# Altium PCB System Control.PcbDoc (part 7 of 7)
Units mil, origin at the board's own origin, x right, y up, seen from the top; angles counter-clockwise.
Board outline 5312.56 x 5103.22 mil, 12 copper layers (Top, GND 2, Signal 3, Signal 4, 3.3V 5, Signal 6, Signal 7, 2.5V 8, Signal 9, Signal 10, GND 11, Bottom); 503 components, 484 nets, 2219 pads, 1158 vias.
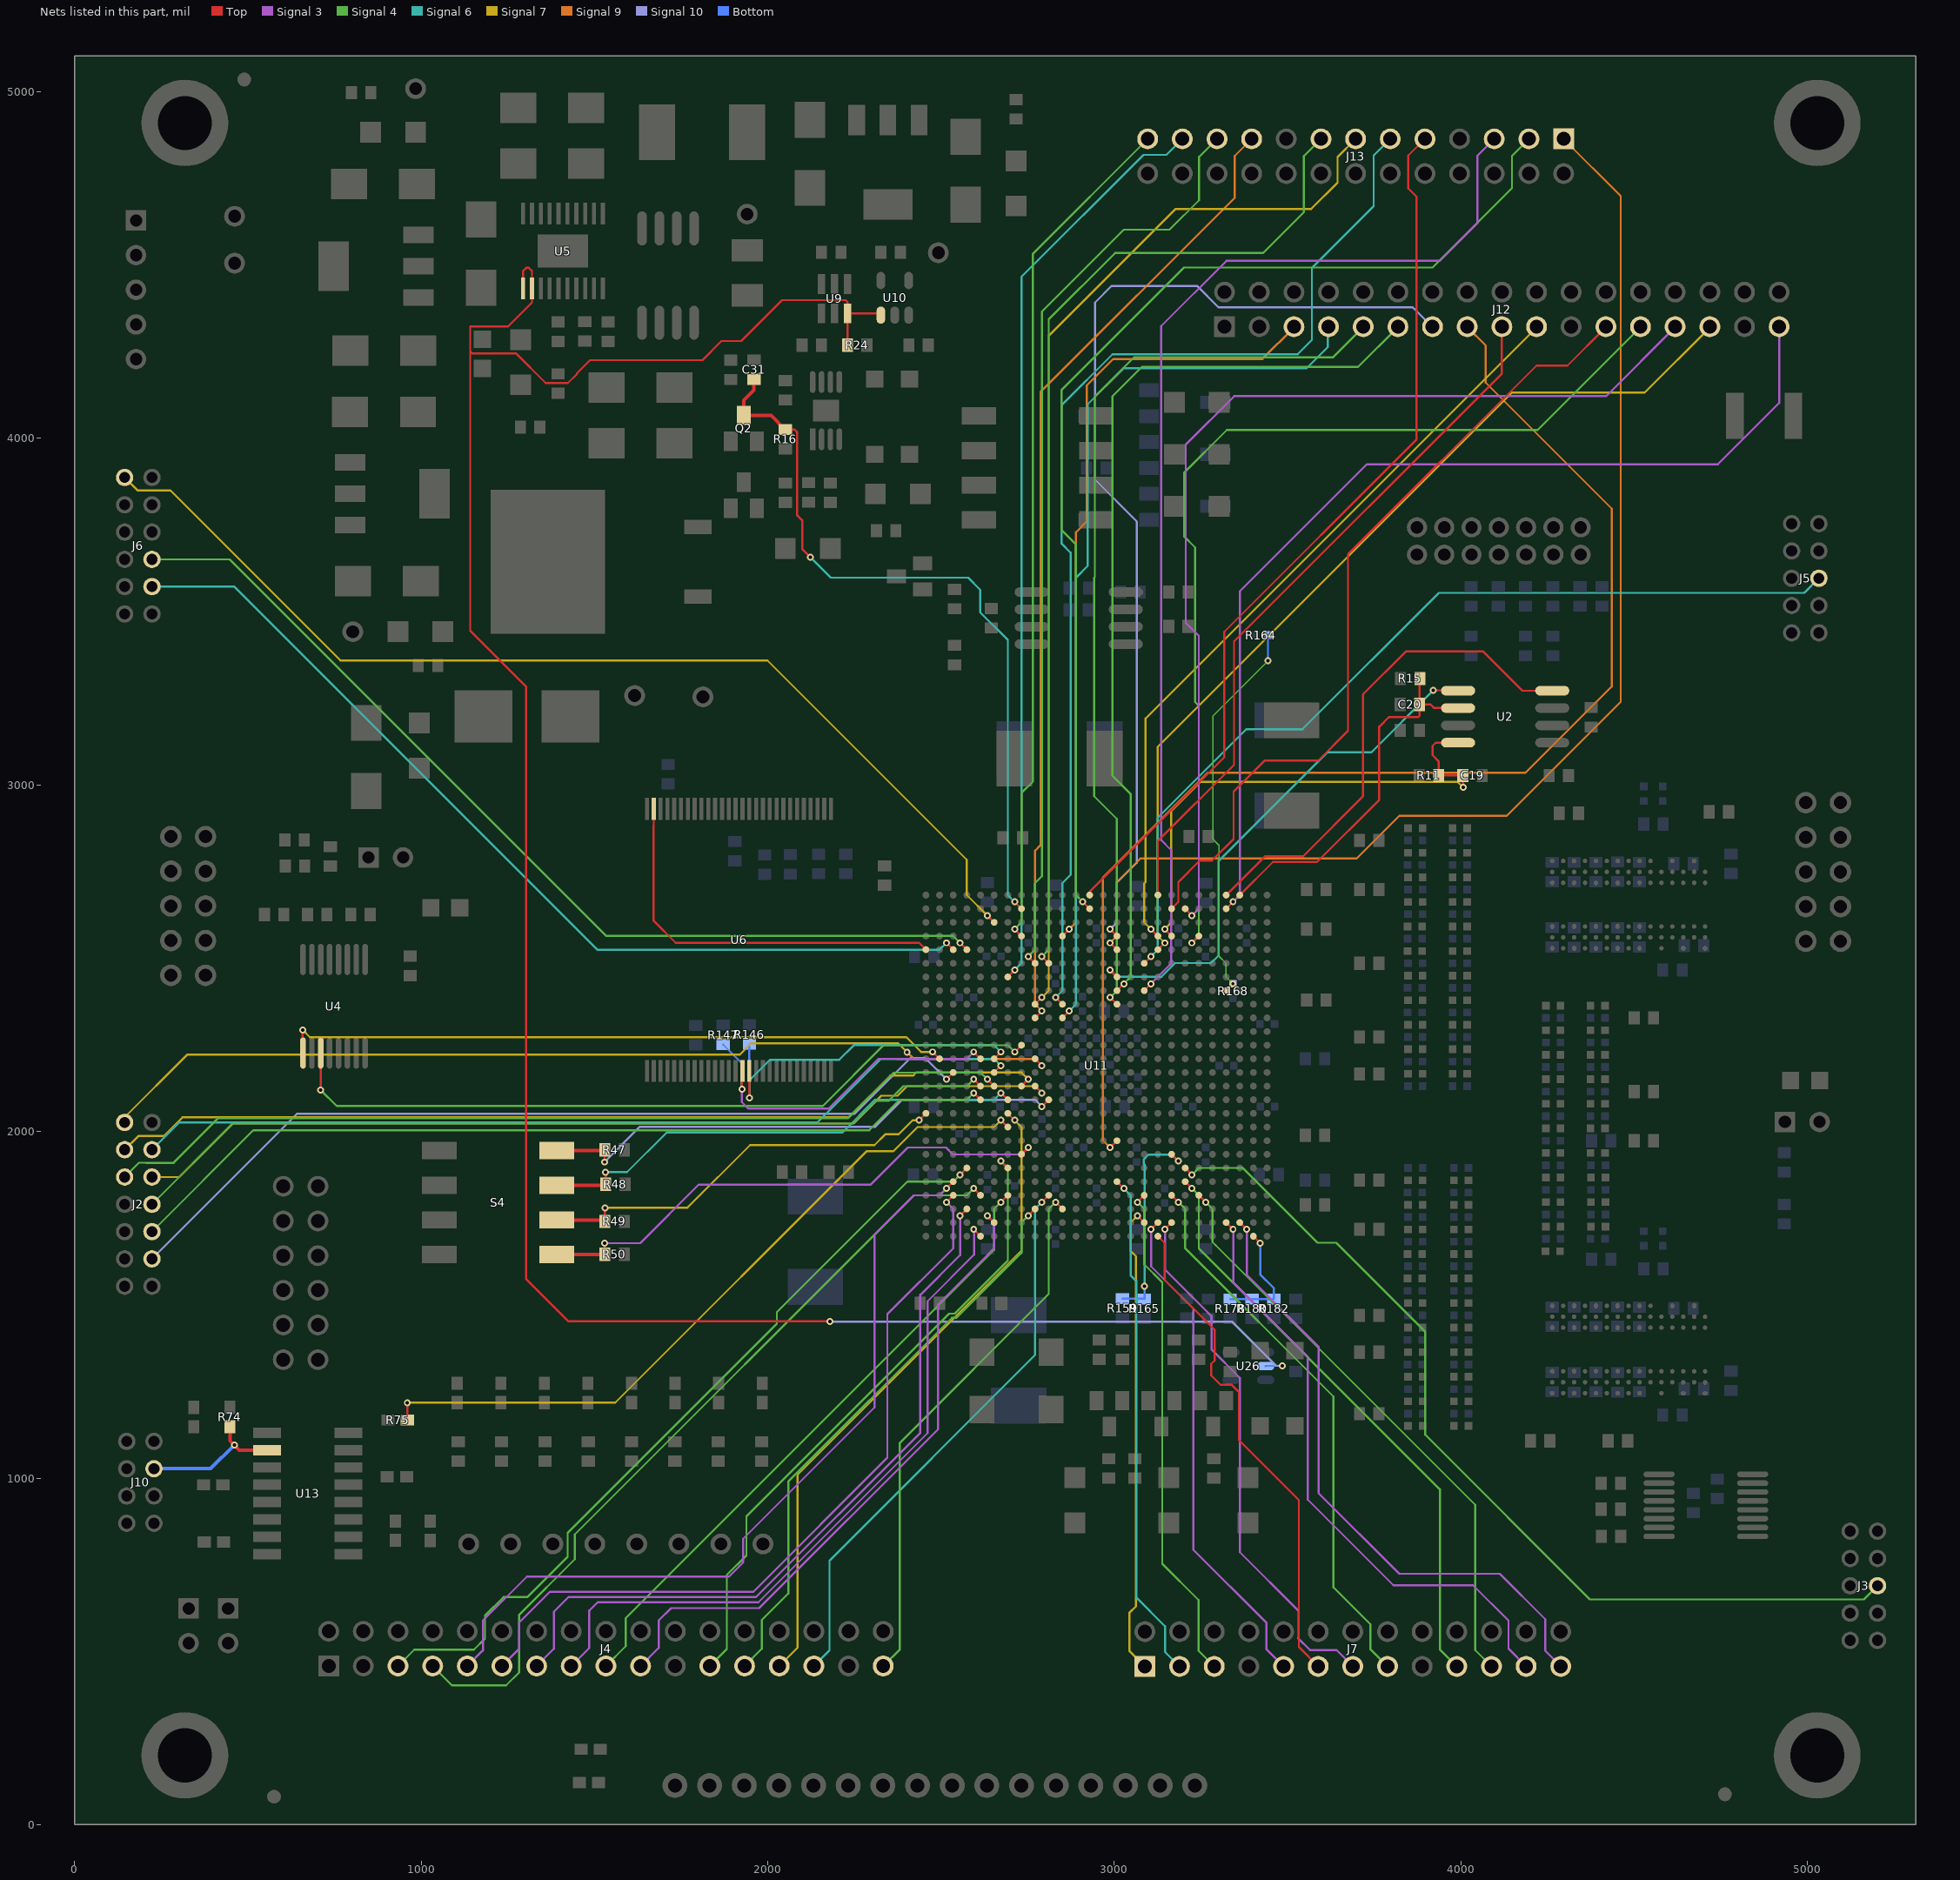
[diagram p17: the nets of this part, all layers, seen from the top]

## Via types
v1: diameter 20, hole 10, Top to Bottom, tented top, 1040 vias
v2: diameter 20, hole 8, Top to Bottom, tented top, 118 vias

## Nets (pads, with @x,y where several pads share a name; then routed paths per layer and width w, separated by ;. In a path a pad name is that pad's centre, name@x,y a point inside that pad or via, vN(x,y) a via of type N, cw(c..) or ccw(c..) an arc to the next point about the centre after c; other vN are vias at no path point) (continued)
PARALLEL_FLASH_R\E\S\E\T\: R146.1 U6.16 U11.P21 | length 1086.7
  Top w5.91: v1(1946.53,2097.47) U6.16@1946.53,2175.05 U6.16@1947,2175.52 ; U11.P21@2653.1,2209.84 v1(2672.79,2229.53)
  Signal 6 w5.91: v1(1946.53,2097.47) 1946.53,2147.53 2006,2207 2206,2207 2248.21,2249.21 2410.79,2249.21 2653.1,2249.21 v1(2672.79,2229.53)
  Bottom w5.91: v1(1946.53,2097.47) R146.1@1946.53,2251.53
PARALLEL_FLASH_VPEN: R147.2 U6.15 U11.P22 | length 1017.6
  Top w5.91: v1(1926,2122) 1925,2122 1925,2173.2 U6.15@1926.84,2175.05 ; v1(2594.04,2229.53) U11.P22@2613.73,2209.84
  Signal 3 w5.91: v1(1926,2122) 1925,2122 1925,2085 1944,2066 2175,2066 2319,2210 2373,2210 ; 2373.16,2209.84 2574.36,2209.84 v1(2594.04,2229.53)
  Bottom w5.91: R147.2@1871,2251 1925,2197 1925,2122 v1(1926,2122)
PARALLEL_FLASH_W\E\: U6.55 U11.AB26 | length 1142.9
  Top w5.91: U6.55@1670.94,2930.95 1671,2930.89 1671,2884.23 1670.75,2883.97 1670.75,2608.25 1734.51,2544.49 2436.56,2544.49 U11.AB26@2456.25,2524.8
POWER_SUPERVISOR_R\S\T\: C31.1 Q2.3 R16.2 U11.AE19 | length 2398.7
  Top w5.91: R16.2@2050.74,4025.68 2076.91,4025.68 2084.08,4018.51 2084.08,3778.69 2099.16,3763.61 2099.16,3680.64 v1@2122.9,3656.9 ; v1(2712.15,2662.6) U11.AE19@2731.84,2642.91
  Top w10: C31.1@1960.19,4170.47 1960.19,4138.98 1930.78,4109.57 Q2.3@1930.76,4066.24 2009.28,4066.26 ; R16.2@2050.74,4025.68 2050.74,4024.8 R16.2@2050.3,4025.24 ; 2009.28,4066.26 R16.2@2050.3,4025.24 ; 2009.28,4066.26 R16.2@2050.3,4025.24 ; 2009.28,4066.26 R16.2@2050.3,4025.24 ; 2009.28,4066.26 R16.2@2050.3,4025.24 ; 2009.28,4066.26 R16.2@2050.3,4025.24
  Signal 6 w5.91: v1(2123,3657) 2182,3598 2578,3598 2613,3563 2613,3498 2692.47,3418.53 2692.47,2717.12 2692.47,2682.28 v1(2712.15,2662.6)
PROG_B: R178.1 R180.1 R182.1 U11.A2 | length 331.5
  Top w5.91: U11.A2@3401.13,1698.03 v1(3420.82,1678.34)
  Bottom w5.91: R178.1@3334.2,1516.93 R180.1@3397.19,1516.93 R182.1@3460.19,1516.93 3460.19,1548.43 3420.82,1587.8 v1(3420.82,1678.34)
PTH_TRACK: R24.1 U5.11 U5.12 U9.3 U10.1 U26.2 | length 6985.7
  Top w5.91: U5.11@1293.85,4432.28 1293.85,4482.85 1303,4492 1310,4492 1319.44,4482.56 U5.12@1319.44,4432.28 1319.44,4391.83 1250.3,4322.69 1141.3,4322.69 1141.3,4250.69 ; v1(2179,1452) 2178,1453 1424,1453 1303,1574 1303,3283 1141.3,3444.7 1141.3,4250.69 ; R24.1@2229.87,4268.9 U9.3@2229.87,4360.43 ; U10.1@2326.33,4355.51 2321.4,4360.43 U9.3@2229.87,4360.43 ; 1141.3,4250.69 1147.3,4244.69 1274.3,4244.69 1359.3,4159.69 1423.3,4159.69 1449.3,4185.69 1449.3,4187.69 1487.3,4225.69 1811.3,4225.69 1866.3,4280.69 1923.3,4280.69 2041.3,4398.69 2224.31,4398.69 2229.87,4393.13 U9.3@2229.87,4360.43
  Signal 10 w5.91: v1(2179,1452) 2179.98,1451.02 3339.88,1451.02 3466.91,1324 v1@3489,1324
  Bottom w5.91: U26.2@3436.56,1323.39 3437.18,1324 v1(3484,1324)
PUDC_B: R159.2 R165.1 U11.G8 | length 608.3
  Top w5.91: U11.G8@3164.91,1934.25 v1(3184.6,1914.56)
  Signal 6 w5.91: v1(3087,1554) 3087,1904.69 3085,1906.69 3085.15,1906.84 3085.15,1920.25 3098.13,1933.23 3165.93,1933.23 v1(3184.6,1914.56)
  Bottom w5.91: R159.2@3023.18,1517.81 3085.29,1517.81 R165.1@3086.17,1516.93 3087,1517.76 v1(3087,1554)
RST_DQS_DIV: R164.1 R168.1 U11.W4 | length 1124.1
  Top w5.91: U11.W4@3322.39,2406.69 v2(3342.08,2426.38)
  Signal 4 w4.02: v2(3342.08,2426.38) 3322.39,2446.06 3322.39,2485 3302,2505.39 3302,2825.89 3284.04,2843.84 3284.04,3199.04 v1(3443,3358)
  Bottom w4.02: v1@3443.12,3357.77 R164.1@3443.12,3431.51
  Bottom w5.91: R164.1@3443.12,3431.51 R164.1@3443.8,3432.19
S0_IN: J6.9 U11.AB24 | length 2762
  Top w5.91: v1(2515.3,2544.49) U11.AB24@2534.99,2524.8
  Signal 6 w5.91: J6.9@223.1,3572.12 460.88,3572.12 1508.2,2524.8 2495.62,2524.8 v1(2515.3,2544.49)
S1_IN: J6.7 U11.AB23 | length 2817.7
  Top w5.91: v1(2554.67,2544.49) U11.AB23@2574.36,2524.8
  Signal 4 w5.91: J6.7@223.1,3650.86 447.14,3650.86 1533.83,2564.17 2534.99,2564.17 v1(2554.67,2544.49)
SBC_RX: U4.9 U11.P25 | length 1939
  Top w5.91: v1(658,2293) 658,2227.38 U4.9@658.94,2226.44 ; v1(2475.93,2229.53) U11.P25@2495.62,2209.84
  Signal 7 w5.91: v1(658,2293) 679,2272 2400,2272 2442.47,2229.53 v1(2475.93,2229.53)
SBC_TX: U4.11 U11.R19 | length 2236.4
  Top w5.91: v1(710,2120) 710,2226.29 U4.11@710.14,2226.44 ; v1(2712.48,2229.53) 2732,2249.05 U11.R19@2732.16,2249.21
  Signal 4 w5.91: v1(710,2120) 756,2074 2159,2074 2334,2249 2693,2249 v1(2712.48,2229.53)
SCKA: J3.6 U11.F7 | length 2719.7
  Top w5.91: U11.F7@3204.28,1894.88 v1(3223.97,1875.19)
  Signal 4 w5.91: v1(3223.97,1875.19) 3243.65,1894.88 3370.12,1894.88 3586,1679 3640,1679 3897,1422 3897,1125 4372,650 5162.26,650 J3.6@5201.74,689.48
SCKB: J5.6 U11.AA10 | length 2629.8
  Top w5.91: U11.AA10@3086.17,2485.43 v1(3105.86,2505.12)
  Signal 6 w5.91: v1(3105.86,2505.12) 3125,2524.26 3125,2905 3381,3161 3543,3161 3936,3554 4990.26,3554 J5.6@5032.74,3596.48
SCLK: J2.2 U11.P18 | length 2804.5
  Top w5.91: U11.P18@2771.21,2209.84 v1(2790.9,2190.16)
  Signal 9 w5.91: v1(2402,2229) 2402.25,2229 2421.41,2209.84 2771.21,2209.84 v1(2790.9,2190.16)
  Signal 7 w5.91: J2.2@144.36,2026.34 144.36,2041.36 324.66,2221.66 1918.66,2221.66 1951.66,2254.66 2376.34,2254.66 v1(2402,2229)
STEP_IN: J6.2 U11.AD21 | length 3099.8
  Top w5.91: v1(2633.41,2623.23) U11.AD21@2653.1,2603.54
  Signal 7 w5.91: J6.2@144.36,3887.08 181.44,3850 276,3850 767,3359 1999,3359 2574,2784 2574,2682.64 v1(2633.41,2623.23)
SW_1: R47.1 S4.8 U11.L17 | length 1545.6
  Top w5.91: R47.1@1528,1945 1529,1944 v1(1529,1912) ; v1(2790.89,2072.04) U11.L17@2810.58,2091.73
  Top w10: S4.8@1391,1945 1528,1945 R47.1@1530,1947
  Signal 10 w5.91: v1(1529,1912) 1631,2014 2310,2014 2387.73,2091.73 2771.21,2091.73 v1(2790.89,2072.04)
SW_2: R48.1 S4.7 U11.L20 | length 1440.5
  Top w5.91: R48.1@1532,1848 v1(1532,1883) ; v1(2672.78,2111.42) U11.L20@2692.47,2091.73
  Top w10: S4.7@1391,1845 1529,1845 R48.1@1532,1848
  Signal 6 w5.91: v1(1532,1883) 1594,1883 1708,1997 2215,1997 2309.73,2091.73 2653.1,2091.73 v1(2672.78,2111.42)
SW_3: R49.1 S4.6 U11.K26 | length 1218.7
  Top w5.91: R49.1@1530,1741 v1(1530,1780) ; v1(2436.56,2032.67) U11.K26@2456.25,2052.36
  Top w10: S4.6@1391,1745 1526,1745 R49.1@1530,1741
  Signal 7 w5.91: v1(1530,1780) 1768,1780 1949,1961 2308,1961 2339,1992 2377,1992 2417.67,2032.67 v1(2436.56,2032.67)
SW_4: R50.1 S4.5 U11.G19 | length 1552.2
  Top w5.91: R50.1@1529,1645 v1(1529,1678) ; U11.G19@2731.84,1934.25 v1(2751.53,1953.94)
  Top w10: S4.5@1391,1645 R50.1@1529,1645
  Signal 3 w5.91: v1(1529,1678) 1632,1678 1801,1847 2297,1847 2404,1954 2514,1954 2534,1934 2731.59,1934 v1(2751.53,1953.94)
TRIG_OUT: J10.3 R74.1 U13.2 | length 418.7
  Top w10: R74.1@448,1148 448,1108 475,1081 U13.2@555,1081
  Bottom w10: J10.3@229,1027.26 392.26,1027.26 v1(461,1096)
TRIG_OUT_FPGA: R75.1 U11.J20 | length 2127.5
  Top w5.91: R75.1@960,1168 v1(960,1217) ; v1(2672.78,2032.68) U11.J20@2692.47,2012.99
  Signal 7 w5.91: v1(960,1217) 961,1218 1560,1218 2285,1943 2362,1943 2431.99,2012.99 2653.1,2012.99 v1(2672.78,2032.68)
USER_SPI_MISO: U2.8 U11.AF4 | length 1451.1
  Top w5.91: U11.AF4@3322.39,2682.28 3434.11,2794 3544,2794 3717,2967 3717,3261 3841,3385 4064,3385 4177.06,3271.94 U2.8@4263.37,3271.94
USER_SPI_MOSI: U2.1 U11.Y12 | length 1542
  Top w5.91: v1(2987.74,2465.75) U11.Y12@3007.43,2446.06 ; v1(3920.23,3272.94) 3990.72,3272.94 U2.1@3991.71,3271.94
  Signal 6 w5.91: v1(2987.74,2465.75) 3006.49,2447 3136,2447 3175,2486 3279,2486 3300,2507 3300,2780 3613.81,3093.81 3741.11,3093.81 v1(3920.23,3272.94)
USER_SPI_S\E\L\: C19.1 R11.1 U2.4 U11.AC8 | length 1536.1
  Top w5.91: v1(3145.22,2583.86) U11.AC8@3164.91,2564.17 ; C19.1@4005.4,3027.23 4006.38,3026.25 v1(4006.38,2993.03)
  Top w6.02: U2.4@3991.71,3121.94 3926.94,3121.94 3918,3113 3918,3086 3935.4,3068.6 R11.1@3935.4,3027.23 C19.1@4005.4,3027.23 C19.1@4005,3027.63
  Signal 7 w5.91: v1(3145.22,2583.86) 3164,2602.64 3164,2924 3249,3009 3990.4,3009 v1(4006.38,2993.03)
  Signal 6 w5.91: v1(4006.38,2993.03) v1@4006.81,2992.59
USER_SPI_SCK: C20.1 R15.2 U2.2 U11.AF3 | length 1080.3
  Top w5.91: U11.AF3@3361.76,2682.28 3457.48,2778 3585,2778 3764,2957 3764,3168 3791.87,3195.87 3876.87,3195.87 3880.4,3199.4 C20.1@3880.4,3232.23
  Top w6.02: R15.2@3881.4,3307.23 3880.4,3306.23 C20.1@3880.4,3232.23 3912.29,3232.23 3922.58,3221.94 U2.2@3991.71,3221.94
~ADC_CS: J2.11 U11.N24 | length 2585.4
  Top w5.91: v1(2515.3,2150.79) U11.N24@2534.99,2170.47
  Signal 10 w5.91: J2.11@223.1,1632.64 641.46,2051 2250.39,2051 2411.39,2212 2454.09,2212 v1(2515.3,2150.79)
~ANALOG_CONTROL: J2.9 U11.L22 | length 2564.5
  Top w5.91: v1(2594.04,2111.42) U11.L22@2613.73,2091.73
  Signal 4 w5.91: J2.9@223.1,1711.38 515.72,2004 2293.06,2004 2380.79,2091.73 2574.36,2091.73 v1(2594.04,2111.42)
~DA1: J4.5 U11.F23 | length 2335.2
  Top w5.91: v1(2554.67,1875.19) U11.F23@2574.36,1894.88
  Signal 4 w5.91: J4.5@933,458 980,505 1152,505 1184,537 1184,603.4 1237.3,656.7 1305.7,656.7 1422.37,773.37 1422.37,841.77 2026,1445.4 2026,1479 2402.51,1855.51 2534.99,1855.51 v1(2554.67,1875.19)
~DA2: J4.9 U11.E24 | length 2363.2
  Top w5.91: v1(2515.3,1835.82) U11.E24@2534.99,1855.51
  Signal 3 w5.91: J4.9@1133,458 1178,503 1178,589 1305,716 1888,716 1929,757 1929,825 2308,1204 2308,1702.73 2421.41,1816.14 2495.62,1816.14 v1(2515.3,1835.82)
~DA3: J4.13 U11.C23 | length 2150.1
  Top w5.91: v1(2554.67,1757.08) U11.C23@2574.36,1776.77
  Signal 3 w5.91: J4.13@1333,458 1383,508 1383,615 1425,657 1966,657 2440,1131 2440,1528.83 2555,1643.83 2555,1756.76 v1(2554.67,1757.08)
~DA4: J4.17 U11.D20 | length 1838.4
  Top w5.91: v1(2672.78,1796.45) U11.D20@2692.47,1816.14
  Signal 4 w5.91: J4.17@1533,458 1590.2,515.21 1590.2,596.01 2653.1,1658.9 2653.1,1776.77 v1(2672.78,1796.45)
~DA5: J4.23 U11.F20 | length 1858.3
  Top w5.91: v1(2672.78,1914.57) U11.F20@2692.47,1894.88
  Signal 4 w5.91: J4.23@1833,458 1882,507 1882,721 1938.18,777.18 1938.18,889.79 2523.03,1474.65 2539.74,1474.65 2692.47,1627.38 2692.47,1894.88 v1(2672.78,1914.57)
~DA6: J4.27 U11.K20 | length 1900.1
  Top w5.91: U11.K20@2692.47,2052.36 v1(2712.16,2032.67)
  Signal 7 w5.91: J4.27@2033,458 2086,511 2086,1010 2731.84,1655.84 2731.84,2012.99 v1(2712.16,2032.67)
~DA7: J4.33 U11.C16 | length 1572.3
  Top w5.91: v1(2830.26,1796.46) U11.C16@2849.95,1776.77
  Signal 4 w5.91: J4.33@2333,458 2381,506 2381,1102 2810.58,1531.58 2810.58,1776.77 v1(2830.26,1796.46)
~DA8: J7.3 U11.E12 | length 1473.3
  Top w5.91: U11.E12@3007.43,1855.51 v1(3027.12,1835.82)
  Signal 6 w5.91: v1(3027.12,1835.82) 3046.8,1816.14 3046.8,1585.2 3063,1569 3063,656 3146,573 3146,499 J7.3@3188,457
~DA9: J7.9 U11.B9 | length 1446.8
  Top w5.91: v1(3105.85,1717.71) U11.B9@3125.54,1737.4
  Signal 3 w5.91: v1(3105.85,1717.71) 3106,1717.57 3106,1611 3228,1489 3228,793 3439,582 3439,506 J7.9@3488,457
~DA10: J7.13 U11.B8 | length 1558.9
  Top w5.91: v1(3145.22,1717.71) U11.B8@3164.91,1737.4
  Signal 3 w5.91: v1(3145.22,1717.71) 3146,1716.94 3146,1602 3280.11,1467.89 3280.11,1371.5 3362,1289.61 3362,786 3530.79,617.21 3530.79,539.27 3530,538.48 3564.48,504 3641,504 J7.13@3688,457
~DA11: J7.19 U11.E7 | length 1723.1
  Top w5.91: U11.E7@3204.28,1855.51 v1(3223.97,1835.82)
  Signal 4 w5.91: v1(3223.97,1835.82) 3243.65,1816.14 3243.65,1663.19 3939,967.84 3939,506 J7.19@3988,457
~DA12: J7.23 U11.B4 | length 1773.7
  Top w5.91: U11.B4@3322.39,1737.4 v1(3342.08,1717.71)
  Signal 3 w5.91: v1(3342.08,1717.71) 3343,1716.79 3343,1565 3558,1350 3558,938 3805,691 4035,691 4137,589 4137,508 J7.23@4188,457
~DB1: J12.5 U11.AC16 | length 2285.4
  Top w5.91: U11.AC16@2849.95,2564.17 v1(2869.64,2583.86)
  Signal 9 w5.91: v1(2869.64,2583.86) 2889,2603.22 2889,3729 2920,3760 2920,4152 2997,4229 3427,4229 3518,4320 J12.5@3518,4321
~DB2: J12.9 U11.V12 | length 2654.9
  Top w5.91: v1(2987.99,2387.01) 2987.75,2387.01 U11.V12@3007.43,2367.32
  Signal 4 w5.91: v1(2987.99,2387.01) 3007,2406.01 3007,2902 2941.52,2967.48 2941.52,3597.86 2943.41,3599.75 2943.41,4120.41 3057,4234 3631,4234 J12.9@3718,4321
~DB3: J12.13 U11.AC12 | length 2961.2
  Top w5.91: v1(2987.74,2583.86) U11.AC12@3007.43,2564.17
  Signal 10 w5.91: v1(2987.74,2583.86) 3007,2603.12 3007,2718 3064.87,2775.87 3064.87,3760.13 2944,3881 2944,4392 2992,4440 3238.48,4440 3300.27,4378.21 3860.79,4378.21 J12.13@3918,4321
~DB4: J12.17 U11.AF9 | length 2049.8
  Top w5.91: U11.AF9@3125.54,2682.28 3125.54,2838.54 3345,3058 3345,3414 4118,4187 J12.17@4118,4321
~DB5: J12.23 U11.AE8 | length 2360.7
  Top w5.91: U11.AE8@3164.91,2642.91 3184.4,2662.4 3184.4,2719.6 3246.8,2782 3282,2782 3344,2844 3344,2981 3433,3070 3588,3070 3674,3156 3674,3666 4218,4210 4307,4210 J12.23@4418,4321
~DB6: J12.27 U11.AE7 | length 2962.8
  Top w5.91: U11.AE7@3204.28,2642.91 v1(3223.97,2623.23)
  Signal 3 w5.91: v1(3223.97,2623.23) 3243.65,2642.91 3243.65,3430.35 3206,3468 3206,3982.05 3346.16,4122.21 4419.21,4122.21 J12.27@4618,4321
~DB7: J12.33 U11.AE4 | length 2932.4
  Top w5.91: U11.AE4@3322.39,2642.91 v1(3342.08,2662.6)
  Signal 3 w5.91: v1(3342.08,2662.6) 3361.76,2682.28 3361.76,3558.76 3728,3925 4741,3925 4918,4102 J12.33@4918,4321
~DB8: J13.3 U11.AE14 | length 3232.9
  Top w5.91: v1(2909,2662.6) U11.AE14@2928.69,2642.91
  Signal 4 w5.91: v1(2909,2662.6) 2889.32,2682.28 2889.32,3693.68 2848,3735 2848,4140 3201,4493 3918,4493 4147,4722 4147,4815 J13.3@4196,4864
~DB9: J13.9 U11.AF14 | length 2602.3
  Top w5.91: U11.AF14@2928.69,2682.28 2928.69,2691.69 3317,3080 3317,3442 3872,3997 3872,4697 3848,4721 3848,4816 J13.9@3896,4864
~DB10: J13.13 U11.V18 | length 3108.8
  Top w5.91: U11.V18@2771.21,2367.32 v1(2790.9,2387.01)
  Signal 7 w5.91: v1(2790.9,2387.01) 2810.58,2406.69 2810.58,4295.58 3177,4662 3568,4662 3644,4738 3644,4812 J13.13@3696,4864
~DB11: J13.19 U11.U18 | length 2811.2
  Top w5.91: U11.U18@2771.21,2327.95 v1(2790.9,2347.64)
  Signal 9 w5.91: v1(2790.9,2347.64) 2771.21,2367.32 2771.21,2810.21 2787,2826 2787,4134 3347,4694 3347,4815 J13.19@3396,4864
~DB12: J13.23 U11.Y20 | length 2665.2
  Top w5.91: U11.Y20@2692.47,2446.06 v1(2712.16,2465.75)
  Signal 6 w5.91: v1(2712.16,2465.75) 2731.84,2485.43 2731.84,4465.84 3084,4818 3150,4818 J13.23@3196,4864
~FSA_1: J4.7 U11.D22 | length 2345.3
  Top w5.91: v1(2594.04,1835.83) U11.D22@2613.73,1816.14
  Signal 4 w5.91: J4.7@1033,458 1089,402 1245,402 1283,440 1283,606 1443.13,766.13 1443.13,837.87 2421.41,1816.14 2574.36,1816.14 v1(2594.04,1835.83)
~FSA_2: J4.11 U11.D24 | length 2257.6
  Top w5.91: v1(2515.3,1796.45) U11.D24@2534.99,1816.14
  Signal 3 w5.91: J4.11@1233,458 1283,508 1283,584 1371,672 1958,672 2345,1059 2345,1473.2 2534.99,1663.19 2534.99,1776.77 v1(2515.3,1796.45)
~FSA_3: J4.15 U11.A22 | length 2041.1
  Top w5.91: v1(2594.04,1717.72) U11.A22@2613.73,1698.03
  Signal 3 w5.91: J4.15@1433,458 1485,510 1485,618 1509,642 1973,642 2461,1130 2461,1510.46 2595,1644.46 2595,1716.76 v1(2594.04,1717.72)
~FSA_4: J4.19 U11.B21 | length 1906.4
  Top w5.91: v1(2633.41,1757.09) U11.B21@2653.1,1737.4
  Signal 3 w5.91: J4.19@1633,458 1685,510 1685,589 1721,625 1975,625 2491,1141 2491,1501.09 2653.1,1663.19 2653.1,1737.4 v1(2633.41,1757.09)
~FSA_5: J4.25 U11.C18 | length 1673.7
  Top w5.91: v1(2751.52,1757.08) U11.C18@2771.21,1776.77
  Signal 4 w5.91: J4.25@1933,458 1983,508 1983,591 2059,667 2059,990.35 2531.48,1462.84 2544.63,1462.84 2731.84,1650.04 2731.84,1737.4 v1(2751.52,1757.08)
~FSA_6: J4.29 U11.D17 | length 1638.8
  Top w5.91: v1(2790.89,1796.45) U11.D17@2810.58,1816.14
  Signal 6 w5.91: J4.29@2133,458 2178,503 2178,762 2771.21,1355.21 2771.21,1776.77 v1(2790.89,1796.45)
~FSA_7: J7.1 U11.B10 | length 1368.7
  Top w5.91: v1(3066.48,1757.09) U11.B10@3086.17,1737.4
  Signal 7 w5.91: v1(3066.48,1757.09) 3047,1737.6 3047,1655 3062,1640 3062,630 3043,611 3043,502 J7.1@3088,457
~FSA_8: J7.5 U11.D10 | length 1459
  Top w5.91: v1(3066.48,1796.45) U11.D10@3086.17,1816.14
  Signal 4 w5.91: v1(3066.48,1796.45) 3086.17,1776.77 3086.17,1616.83 3138,1565 3138,753 3243,648 3243,502 J7.5@3288,457
~FSA_9: J7.11 U11.A9 | length 1459.6
  Top w5.91: U11.A9@3125.54,1698.03 3145.23,1678.34 3145.23,1571.77 3289.68,1427.32 3289.68,1339.68 3279.52,1329.52 3279.52,1296.48 3307,1269 3338.75,1269 3359,1248.75 3359,1110 3532,937 3532,513 J7.11@3588,457
~FSA_10: J7.15 U11.D8 | length 1617.2
  Top w5.91: U11.D8@3164.91,1816.14 v1(3184.6,1796.45)
  Signal 4 w5.91: v1(3184.6,1796.45) 3204.28,1776.77 3204.28,1663.19 3632,1235.47 3632,685 3739,578 3739,506 J7.15@3788,457
~FSA_11: J7.21 U11.D6 | length 1708.9
  Top w5.91: U11.D6@3243.65,1816.14 v1(3263.34,1796.45)
  Signal 4 w5.91: v1(3263.34,1796.45) 3283.02,1776.77 3283.02,1681.11 3291.98,1672.15 4041,923.14 4041,504 J7.21@4088,457
~FSA_12: J7.25 U11.B3 | length 1833.9
  Top w5.91: U11.B3@3361.76,1737.4 v1(3381.45,1717.71)
  Signal 3 w5.91: v1(3381.45,1717.71) 3382,1717.16 3382,1586 3589,1379 3589,957 3822,724 4112,724 4243,593 4243,502 J7.25@4288,457
~FSB_1: J12.7 U11.U16 | length 2619.9
  Top w5.91: U11.U16@2849.95,2327.95 v1(2869.64,2347.64)
  Signal 6 w5.91: v1(2869.64,2347.64) 2889.32,2367.32 2889.32,3598.44 2923,3632.12 2923,4098 3027.12,4202.12 3554.06,4202.12 3616,4264.07 3616,4319 J12.7@3618,4321
~FSB_2: J12.11 U11.W12 | length 2659.3
  Top w5.91: U11.W12@3007.43,2406.69 v1(3027.12,2426.38)
  Signal 4 w5.91: v1(3027.12,2426.38) 3046.8,2446.06 3046.8,2974.2 2994,3027 2994,4121 3079,4206 3703,4206 J12.11@3818,4321
~FSB_3: J12.15 U11.H12 | length 3721.5
  Top w5.91: v1(2987.74,1953.93) U11.H12@3007.43,1973.62
  Signal 9 w5.91: v1(2987.74,1953.93) 2967,1974.68 2967,2143.02 2967.04,2143.06 2967.04,2733.04 3269,3035 4186,3035 4435,3284 4435,3797 4071,4161 4071,4268 J12.15@4018,4321
~FSB_4: J12.19 U11.AC9 | length 2242.1
  Top w5.91: v1(3105.85,2583.86) U11.AC9@3125.54,2564.17
  Signal 7 w5.91: v1(3105.85,2583.86) 3086,2603.71 3086,2716 3089.81,2719.81 3089.81,3191.81 4218,4320 J12.19@4218,4321
~FSB_5: J12.25 U11.AC6 | length 2900.9
  Top w5.91: v1(3223.96,2544.49) U11.AC6@3243.65,2564.17
  Signal 4 w5.91: v1(3223.96,2544.49) 3243.65,2564.17 3243.65,3228.65 3232.86,3239.44 3232.86,3685.14 3201,3717 3201,3900.64 3324.36,4024 4221,4024 J12.25@4518,4321
~FSB_6: J12.29 U11.AB9 | length 2696.9
  Top w5.91: U11.AB9@3125.54,2524.8 v1(3145.23,2544.49)
  Signal 7 w5.91: v1(3145.23,2544.49) 3125,2564.71 3125,3110 4147.09,4132.09 4530.09,4132.09 4718,4320 J12.29@4718,4321
~FSB_7: J13.1 U11.AB12 | length 3572.9
  Top w5.91: v1(2987.74,2544.49) U11.AB12@3007.43,2524.8
  Signal 9 w5.91: v1(2987.74,2544.49) 3007,2563.75 3007,2720 3075,2788 3699,2788 3822,2911 4132,2911 4460.79,3239.79 4460.79,4699.21 J13.1@4296,4864
~FSB_8: J13.5 U11.W10 | length 3259.9
  Top w5.91: U11.W10@3086.17,2406.69 v1(3105.86,2426.38)
  Signal 3 w5.91: v1(3105.86,2426.38) 3164,2484.52 3164,2812 3135,2841 3135,4324 3323,4512 3938,4512 4047,4621 4047,4815 J13.5@4096,4864
~FSB_9: J13.11 U11.V16 | length 3239.2
  Top w5.91: v1(2830.26,2387.01) U11.V16@2849.95,2367.32
  Signal 6 w5.91: v1(2830.26,2387.01) 2849.95,2406.69 2849.95,2717.12 2874,2741.18 2874,3670 2848,3696 2848,4096 2994.6,4242.6 3528.6,4242.6 3570,4284 3570,4492 3748,4670 3748,4816 J13.11@3796,4864
~FSB_10: J13.15 U11.AA17 | length 2970.2
  Top w5.91: v1(2790.89,2505.12) U11.AA17@2810.58,2485.43
  Signal 4 w5.91: v1(2790.89,2505.12) 2810.58,2524.8 2810.58,4343.34 3002.24,4535 3429,4535 3547,4653 3547,4815 J13.15@3596,4864
~FSB_11: J13.21 U11.AA18 | length 2689.6
  Top w5.91: v1(2751.52,2505.12) U11.AA18@2771.21,2485.43
  Signal 4 w5.91: v1(2751.52,2505.12) 2771.21,2524.8 2771.21,2717.12 2791,2736.92 2791,4366 3027,4602 3159,4602 3244,4687 3244,4812 J13.21@3296,4864
~FSB_12: J13.25 U11.AC19 | length 2467
  Top w5.91: v1(2712.15,2583.86) U11.AC19@2731.84,2564.17
  Signal 4 w5.91: v1(2712.15,2583.86) 2731.84,2603.54 2731.84,2976.84 2765,3010 2765,4533 J13.25@3096,4864
~SYNC1: J2.3 U11.N21 | length 2594.3
  Top w5.91: U11.N21@2653.1,2170.47 v1(2672.79,2190.16)
  Signal 6 w5.91: J2.3@223.1,1947.6 301.5,2026 2143,2026 2326.84,2209.84 2653.1,2209.84 v1(2672.79,2190.16)
~SYNC2: J2.4 U11.M19 | length 2735.5
  Top w5.91: U11.M19@2731.84,2131.1 v1(2751.53,2150.79)
  Signal 7 w5.91: J2.4@144.36,1947.6 183.76,1987 257,1987 311,2041 2233,2041 2353.39,2161.39 2419.39,2161.39 2428.34,2170.34 2731.7,2170.34 2731.84,2170.47 v1(2751.53,2150.79)
~SYNC3: J2.5 U11.M18 | length 2712.4
  Top w5.91: U11.M18@2771.21,2131.1 v1(2790.9,2111.42)
  Signal 7 w5.91: J2.5@223.1,1868.86 301.84,1868.86 455.98,2023 2247,2023 2327.54,2103.54 2374.54,2103.54 2402.1,2131.1 2771.21,2131.1 v1(2790.9,2111.42)
~SYNC4: J2.6 U11.M21 | length 2649.8
  Top w5.91: v1(2633.41,2150.79) U11.M21@2653.1,2131.1
  Signal 4 w5.91: J2.6@144.36,1868.86 185.5,1910 207.24,1910 207.44,1909.8 285.8,1909.8 415,2039 2232,2039 2363,2170 2614.2,2170 v1(2633.41,2150.79)
~SYNC5: J2.7 U11.M22 | length 2548.2
  Top w5.91: v1(2594.04,2150.79) U11.M22@2613.73,2131.1
  Signal 4 w5.91: J2.7@223.1,1790.12 455.98,2023 2246,2023 2312,2089 2349,2089 2391.1,2131.1 2574.36,2131.1 v1(2594.04,2150.79)
pads on no net: DISP1.15 DISP1.16 F1.1 F1.1_1 F2.1 F2.1_1 F4.1 F4.1_1 J1.9 J6.6 J8.9 J14.12 J14.14 S2.5 U4.10 U6.56 U7.5 U9.4 U10.4 U11.A5 U11.A7 U11.A13 U11.A17 U11.A23 U11.A24 U11.AA4 U11.AA8 U11.AA9 U11.AA14 U11.AA19 U11.AA20 U11.AA22 U11.AB3 U11.AB4 U11.AB6 U11.AB10 U11.AB13 U11.AB17 U11.AB20 U11.AC5 U11.AC7 U11.AC10 U11.AC13 U11.AC15 U11.AC17 U11.AC18 U11.AC20 U11.AC22 U11.AD5 U11.AD9 U11.AD10 U11.AD12 U11.AD15 U11.AD16 U11.AD19 U11.AD23 U11.AE1 U11.AE20 U11.AF2 U11.AF7 U11.AF15 U11.AF17 U11.AF22 U11.B1 U11.B2 U11.B12 U11.B24 U11.B25 U11.B26 U11.C2 U11.C4 U11.C8 U11.C12 U11.D1 U11.D2 U11.D3 U11.D5 U11.D7 U11.D12 U11.D14 U11.D15 U11.D19 U11.E1 U11.E3 U11.E4 U11.E6 U11.E9 U11.E10 U11.E11 U11.E14 U11.E18 U11.E20 U11.F2 U11.F3 U11.F4 U11.F5 U11.F9 U11.F10 U11.F12 U11.F13 U11.F14 U11.F15 U11.F18 U11.G1 U11.G2 U11.G3 U11.G4 U11.G5 U11.G6 U11.G9 U11.G11 U11.G12 U11.G13 U11.G14 U11.G15 U11.G16 U11.G18 U11.G25 U11.G26 U11.H1 U11.H2 U11.H6 U11.H7 U11.H9 U11.H10 U11.H13 U11.H15 U11.H17 U11.H18 U11.H23 U11.H24 U11.H25 U11.H26 U11.J1 U11.J3 U11.J4 U11.J5 U11.J6 U11.J7 U11.J8 U11.J9 U11.J10 U11.J11 U11.J12 U11.J13 U11.J14 U11.J15 U11.J17 U11.K1 U11.K6 U11.K7 U11.K8 U11.K9 U11.K11 U11.K12 U11.K14 U11.K16 U11.K24 U11.L7 U11.L9 U11.L10 U11.L23 U11.M2 U11.M9 U11.M24 U11.N23 U11.N25 U11.N26 U11.P3 U11.R2 U11.R20 U11.R23 U11.R24 U11.T20 U11.U3 U11.U11 U11.U15 U11.U20 U11.U21 U11.U22 U11.U23 U11.U24 U11.U25 U11.U26 U11.V4 U11.V11 U11.V13 U11.V14 U11.V15 U11.V17 U11.V19 U11.V21 U11.V22 U11.V23 U11.V24 U11.V25 U11.V26 U11.W1 U11.W13 U11.W15 U11.W18 U11.W20 U11.W21 U11.W23 U11.W25 U11.W26 U11.Y3 U11.Y4 U11.Y8 U11.Y11 U11.Y13 U11.Y14 U11.Y16 U11.Y18 U11.Y19 U11.Y21 U11.Y22 U11.Y24 U11.Y25 U11.Y26 U21.A2 U21.E2 U21.L1 U21.R3 U21.R7 U21.R8 U22.A2 U22.E2 U22.L1 U22.R3 U22.R7 U22.R8 U23.10

## Polygon pours and split planes (outlines as drawn)
GND on GND 2 (split plane): 5288.89,22.58 32.62,22.58 32.62,559.44 668,559.44 670.45,559.68 672.81,560.4 674.98,561.56 676.88,563.12 678.44,565.02 679.6,567.19 680.32,569.55 680.56,572 680.56,1278 680.32,1280.45 679.6,1282.81 678.44,1284.98 676.88,1286.88 674.98,1288.44 672.81,1289.6 670.45,1290.32 668,1290.56 32.62,1290.56 32.62,5079.6 5288.89,5079.6
GND_CAM on GND 2 (split plane): 655.44,584.56 32.62,584.56 32.62,1265.44 655.44,1265.44
+3.3V on 3.3V 5 (split plane): 183 vertices, not listed, extent 35.36,24.35 5288.89,5079.6
+0.9V on 3.3V 5 (split plane): 5288.89,3269.65 4849.95,3269.65 4847.5,3269.41 4845.14,3268.69 4842.97,3267.53 4841.07,3265.97 4839.51,3264.06 4838.35,3261.89 4837.63,3259.54 4837.39,3257.09 4837.39,1222.92 4699.08,1084.61 3752.79,1084.61 3665.66,1171.74 3665.66,1835 3665.42,1837.45 3664.7,1839.81 3663.54,1841.98 3661.98,1843.88 3388.59,2117.27 3386.69,2118.83 3384.52,2119.99 3382.16,2120.71 3379.71,2120.95 3122.35,2120.95 3122.35,2452.69 3457.51,2787.85 3560.53,2787.85 3562.98,2788.09 3565.34,2788.8 3567.51,2789.96 3569.41,2791.53 3654.07,2876.18 3669.03,2891.14 3670.59,2893.04 3671.75,2895.22 3672.46,2897.57 3672.71,2900.02 3672.71,4185.47 3901.13,4185.47 3903.58,4185.71 3905.94,4186.43 3908.11,4187.59 3910.01,4189.15 3911.58,4191.05 3912.74,4193.22 3913.45,4195.58 3913.69,4198.03 3913.69,4957.87 3913.45,4960.32 3912.74,4962.68 3911.58,4964.85 3910.01,4966.75 3908.11,4968.32 3905.94,4969.48 3903.58,4970.19 3901.13,4970.43 2011.37,4970.43 2008.92,4970.19 2006.56,4969.48 2004.39,4968.32 2002.49,4966.75 2000.92,4964.85 1999.76,4962.68 1999.05,4960.32 1998.81,4957.87 1998.81,4584.61 1401.88,4584.61 1401.88,5079.6 5288.89,5079.6
+1.2V on 3.3V 5 (split plane): 3888.57,4210.59 3660.15,4210.59 3657.69,4210.35 3655.34,4209.63 3653.17,4208.47 3651.26,4206.91 3649.7,4205.01 3648.54,4202.84 3647.83,4200.48 3647.58,4198.03 3647.58,2905.23 3636.3,2893.94 3555.33,2812.97 3452.31,2812.97 3449.86,2812.73 3447.5,2812.01 3445.33,2810.85 3443.43,2809.29 3100.91,2466.77 3099.35,2464.87 3098.19,2462.7 3097.47,2460.34 3097.23,2457.89 3097.23,2312.2 3097.23,2009.8 2859.09,2009.8 2811.33,2057.57 2811.33,2787.32 2870.9,2846.89 3054.67,2846.89 3057.12,2847.13 3059.48,2847.84 3061.65,2849 3063.55,2850.57 3138.36,2925.37 3139.92,2927.27 3141.08,2929.45 3141.8,2931.8 3142.04,2934.25 3142.04,3646 3142.04,3731.27 3230.88,3820.12 3232.44,3822.02 3233.6,3824.19 3234.32,3826.55 3234.56,3829 3234.56,4102.48 3234.32,4104.93 3233.6,4107.28 3232.44,4109.46 3230.88,4111.36 3142.04,4200.2 3142.04,4575.98 3141.8,4578.43 3141.08,4580.79 3139.92,4582.96 3138.36,4584.87 3136.46,4586.43 3134.28,4587.59 3131.93,4588.3 3129.48,4588.55 2715.98,4588.55 2713.53,4588.3 2711.18,4587.59 2709.01,4586.43 2707.1,4584.87 2539.8,4417.56 2145.56,4417.56 2145.56,4645.17 2236.78,4736.39 2236.79,4736.39 2319.46,4819.07 2321.02,4820.97 2322.18,4823.15 2322.9,4825.5 2323.14,4827.95 2323.14,4945.31 3888.57,4945.31
3V3_CAM on 3.3V 5 (split plane): 657.44,585.56 35.36,585.56 35.36,1267.44 657.44,1267.44
+3.3V on 2.5V 8 (split plane): 257 vertices, not listed, extent 33.25,23.73 5288.89,5079.6
+5V on 2.5V 8 (split plane): 2530.3,3636.31 2175.71,3281.72 2062.56,3168.56 1665,3168.56 1662.55,3168.32 1660.19,3167.6 1658.02,3166.44 1656.12,3164.88 1329.26,2838.02 1327.7,2836.12 1326.53,2833.95 1325.82,2831.59 1325.58,2829.14 1325.58,2091.73 1325.82,2089.28 1326.53,2086.93 1327.7,2084.75 1329.26,2082.85 1331.16,2081.29 1333.33,2080.13 1335.69,2079.41 1338.14,2079.17 1673.44,2079.17 1673.44,1894.88 1673.68,1892.43 1674.4,1890.07 1675.56,1887.9 1677.12,1886 1679.02,1884.44 1681.19,1883.28 1683.55,1882.56 1686,1882.32 1939.75,1882.32 1939.75,1422.44 1939.99,1419.99 1940.71,1417.63 1941.87,1415.46 1943.43,1413.56 1945.33,1412 1947.5,1410.84 1949.86,1410.12 1952.31,1409.88 2498.44,1409.88 2498.44,1070 2498.44,702 2498.68,699.55 2499.4,697.19 2500.56,695.02 2502.12,693.12 2504.02,691.56 2506.19,690.4 2508.55,689.68 2511,689.44 4773,689.44 4775.45,689.68 4777.81,690.4 4779.98,691.56 4781.88,693.12 4831.88,743.12 4871.88,783.12 4873.44,785.02 4874.6,787.19 4875.32,789.55 4875.56,792 4875.56,1032.44 4942.44,1032.44 4942.44,926 4942.44,616.1 1908,616.1 1905.55,615.86 1903.19,615.15 1901.02,613.99 1899.12,612.42 1897.56,610.52 1896.4,608.35 1895.68,605.99 1895.44,603.54 1895.44,23.73 1660.56,23.73 1660.56,603 1660.53,603.27 1660.56,603.54 1660.32,605.99 1659.6,608.35 1658.44,610.52 1656.88,612.42 1654.98,613.99 1652.81,615.15 1650.45,615.86 1648,616.1 1439.2,616.1 835.31,1220 835.31,1368.87 835.07,1371.32 834.35,1373.68 833.19,1375.85 831.63,1377.75 371.18,1838.2 371.18,1930.31 371.18,2957.87 371.18,4571.3 825.8,4571.3 875.98,4521.12 877.88,4519.56 880.05,4518.4 882.41,4517.68 884.86,4517.44 1115,4517.44 1117.45,4517.68 1119.81,4518.4 1121.98,4519.56 1123.88,4521.12 1174.06,4571.3 2530.3,4571.3
+1.8V on 2.5V 8 (split plane): 2036.44,4781.8 2036.44,4691 2036.68,4688.55 2037.4,4686.19 2038.56,4684.02 2040.12,4682.12 2042.02,4680.56 2044.19,4679.4 2046.55,4678.68 2049,4678.44 2637.8,4678.44 2663.44,4652.8 2663.44,3786 2663.68,3783.55 2664.4,3781.19 2665.56,3779.02 2667.12,3777.12 3506.12,2938.12 3508.02,2936.56 3510.19,2935.4 3512.55,2934.68 3515,2934.44 4768.8,2934.44 4807.44,2895.8 4807.44,1202 4807.68,1199.55 4808.17,1197.93 4692.8,1082.56 4146.56,1082.56 4146.56,1785 4146.32,1787.45 4145.6,1789.81 4144.44,1791.98 4142.88,1793.88 4098.88,1837.88 4096.98,1839.44 4094.81,1840.6 4092.45,1841.32 4090,1841.56 3347.2,1841.56 3157.79,2030.98 3157.79,2368 3157.79,2381.02 3329.96,2553.2 3331.52,2555.1 3332.68,2557.27 3333.4,2559.63 3333.64,2562.08 3333.64,2753.08 3333.64,2856.92 3333.4,2859.37 3332.68,2861.73 3331.52,2863.9 3329.96,2865.8 3277.88,2917.88 3275.98,2919.44 3273.81,2920.6 3271.45,2921.32 3270.3,2921.43 2555.42,3636.31 2555.42,4583.86 2555.18,4586.31 2554.47,4588.67 2553.31,4590.84 2551.74,4592.74 2549.84,4594.3 2547.67,4595.46 2545.31,4596.18 2542.86,4596.42 1116.34,4596.42 1085.56,4627.2 1085.56,4678.8 1218.2,4811.44 2006.8,4811.44
3V3_CAM on 2.5V 8 (split plane): 653.44,585.56 33.25,585.56 33.25,1273.44 653.44,1273.44
EGND on GND 11 (split plane): 5288.89,26.01 32.05,26.01 32.05,5079.6 5288.89,5079.6
GND on GND 11 (split plane): 4851.49,4641.9 4853.14,4640.56 4853.14,704.58 665.66,704.58 665.66,4766.4 674.24,4787.12 694.97,4795.71 2944.27,4795.71 2946.72,4795.95 2949.07,4796.66 2951.24,4797.82 2953.15,4799.38 3054.2,4900.44 4592.96,4900.44

## Keep-outs
Board:
  lines w5: 310.03,5100.74 5310.03,5100.74 ; 5310.03,600.74 5310.03,5100.74 ; 5310.03,5100.74 5310.03,2.48 2.47,2.48 2.47,5100.74 5310.03,5100.74

## Other copper
Top:
  text "1" at 5245.14,3332.83 h76 r90
  text "PCBS-GEN-0914-01" at 3637,58 h60
  text "Layer 1 (Top)" at 3713.81,-462.82 h50
Signal 3:
  text "3" at 5245.14,3482.24 h76 r90
  text "Layer 3 (Signal)" at 3711.76,-460.77 h60
Signal 4:
  text "4" at 5245.14,3554.88 h76 r90
  text "Layer 4 (Signal)" at 3713.81,-460.77 h50
Signal 9:
  text "9" at 5245.14,3989.68 h76 r90
  text "Layer 9 (Signal)" at 3711.76,-464.87 h50
Signal 10:
  text "10" at 5245.14,4063.86 h76 r90
Signal 7:
  text "7" at 5245.14,3814.29 h76 r90
  text "Layer 7 (Signal)" at 3713.81,-460.77 h50
Signal 6:
  text "6" at 5245.14,3734.01 h76 r90
  text "Layer 6 (Signal)" at 3711.76,-466.92 h50
Bottom:
  text "12" at 5245.14,4303.16 h76 r90
  text "Layer 12 (Bottom)" at 3717.94,-454.59 h50
GND 2 (plane layer: these items are gaps in the copper):
  region: 5266.2,3371.89 5131.2,3371.89 5131.2,3302.56 5266.2,3302.56
  region: 5266.71,4445.86 5128.92,4445.86 5128.92,3458.94 5266.71,3459.2
  lines w25: 2.47,572 668,572 668,1278 7.54,1278
  lines w50: 7.54,-2.5 7.54,5104.68 5313.97,5104.68 5313.97,-2.5 7.54,-2.5
  text "2" at 5245.14,3390.19 h76 r90
  text "Layer 2 (GND plane)" at 3717.94,-456.64 h50
3.3V 5 (plane layer: these items are gaps in the copper):
  region: 5266.68,4371.38 5128.88,4371.38 5128.88,3721.77 5266.68,3721.77
  region: 5266.71,3632.79 5128.92,3632.79 5128.92,3304.13 5266.71,3304.13
  lines w25: 10.28,573 670,573 670,1280 11.28,1280 ; 2789,4575.98 2715.98,4575.98 ; 3109.79,2108.39 3379.71,2108.39 3653.1,1835 3653.1,1166.53 3747.59,1072.05 4704.28,1072.05 4849.95,1217.72 4849.95,3257.09 5322.39,3257.09 5322.39,5103.54 1389.32,5103.54 1389.32,4572.05 2011.37,4572.05 2011.37,4957.87 3901.13,4957.87 ; 3109.79,2312.2 3109.79,1997.24 ; 2715.98,4575.98 2545,4405 2131,4405 2133,4407 2133,4650.37 2227.9,4745.27 2310.58,4827.95 2310.58,4957.87 3901.13,4957.87 ; 2715.98,4575.98 3129.48,4575.98 3129.48,4195 3222,4102.48 3222,3829 3129.48,3736.48 3129.48,3646 3129.48,2934.25 3054.67,2859.45 2865.7,2859.45 2798.77,2792.52 2798.77,2052.36 2853.89,1997.24 3109.79,1997.24 ; 3109.79,1997.24 3109.79,2457.89 3452.31,2800.41 3560.53,2800.41 3645.19,2885.06 3660.15,2900.02 3660.15,4198.03 3901.13,4198.03 ; 3901.13,4198.03 3901.13,4957.87 ; 3901.13,4198.03 3901.13,4957.87
  lines w50: 10.28,-0.73 10.28,5104.68 5313.97,5104.68 5313.97,-0.73 10.28,-0.73
  text "5" at 5245.14,3652.83 h76 r90
  text "Layer 5 (3.3V plane)" at 3711.76,-464.87 h50
2.5V 8 (plane layer: these items are gaps in the copper):
  region: 5266.71,4445.86 5128.92,4445.86 5128.92,3967.87 5266.71,3967.87
  region: 5266.71,3884.96 5128.92,3884.96 5128.92,3304.13 5266.71,3304.13
  lines w25: 0,573 666,573 666,1286 3,1286 ; 1078.3,5103.54 5314.52,5103.54 5314.52,1217.72 ; 1205,4583.86 1168.86,4583.86 ; 1648,0 1648,603 ; 1648,603.54 1434,603.54 822.75,1214.79 822.75,1368.87 358.62,1833 358.62,1930.31 358.62,2957.87 358.62,4581.62 ; 1908,-1.35 1908,603.54 2542.86,603.54 4956.54,603.54 4955,605.09 4955,926 4955,1045 4863,1045 4863,792 4823,752 4773,702 2511,702 2511,1070 2511,1422.44 1952.31,1422.44 1952.31,1894.88 1686,1894.88 1686,2091.73 1338.14,2091.73 1338.14,2829.14 1665,3156 2067.76,3156 2184.6,3272.83 2542.86,3631.1 ; 3269,2909 3321.08,2856.92 3321.08,2753.08 3321.08,2562.08 3145.23,2386.23 3145.23,2368 3145.23,2025.77 3342,1829 4090,1829 4134,1785 4134,1077 4141,1070 4698,1070 4820,1192 ; 3293.54,2880.43 2542.86,3631.1 ; 4820,1202 4820,2901 4774,2947 3515,2947 2676,3786 2676,4658 2643,4691 2049,4691 2049,4787 2012,4824 1689,4824 1213,4824 1073,4684 1073,4622 1111.14,4583.86 1168.86,4583.86 ; 358.62,4581.62 360.86,4583.86 ; 358.62,4581.62 360.86,4583.86 ; 360.86,4583.86 831,4583.86 884.86,4530 1115,4530 1168.86,4583.86 ; 1168.86,4583.86 2542.86,4583.86 2542.86,3631.1
  lines w50: 8.17,-1.35 8.17,5104.68 5313.97,5104.68 5313.97,-1.35 8.17,-1.35
  text "8" at 5245.14,3902.4 h76 r90
  text "Layer 8 (3.3V plane)" at 3711.76,-454.59 h50
GND 11 (plane layer: these items are gaps in the copper):
  region: 5266.71,4445.86 5128.92,4445.86 5128.92,4290.71 5266.71,4290.71
  region: 5266.71,4189.96 5128.92,4189.96 5128.92,3304.13 5266.71,3304.13
  lines w25: 2867,4808.27 2944.27,4808.27 ; 4860.38,4650.79 4598.16,4913 3049,4913 2944.27,4808.27 ; 4865.7,4650.04 4865.7,692.02 653.1,692.02 653.1,4768.9 664.63,4796.74 692.47,4808.27 2944.27,4808.27
  lines w50: 6.97,0.93 6.97,5104.68 5313.97,5104.68 5313.97,0.93 6.97,0.93
  text "11" at 5245.14,4199.96 h76 r90
  text "Layer 11 (GND plane)" at 3717.94,-460.77 h50

## Silkscreen, mask and mechanical layers (free items; w line width, h text height)
Top Silk:
  lines w5: 3797,1759 3826,1730
  text "Peltier Drive B" at 3101,5031 h60
  text "+3.3V" at 1170.64,4877.05 h40 r90
  text "LIDA" at 413,4717 h40
  text "1.8V" at 2105.43,4512.32 h40 r90
  text "LIDB" at 406,4385 h40
  text "+1.2V" at 2688,4384 h40 r90
  text "Power Relay" at 355,4104 h60 r90
  text "JTAG" at 3942,3860 h60
  text "Motor Cntrl" at 465,3366 h60 r90
  text "+2.5V" at 724.97,3333.05 h40
  text "+5V" at 1556,3327 h40
  text "GND" at 1761,3327 h40
  text "Sensor Int. B" at 4833,3182 h60 r90
  text "1" at 3455.03,2743.74 h40 r90
  text "25" at 2510.03,2738.74 h40 r90
  text "23" at 2590.03,2738.74 h40 r90
  text "21" at 2670.03,2738.74 h40 r90
  text "19" at 2750.03,2738.74 h40 r90
  text "17" at 2825.03,2738.74 h40 r90
  text "15" at 2905.03,2738.74 h40 r90
  text "13" at 2985.03,2738.74 h40 r90
  text "11" at 3060.03,2738.74 h40 r90
  text "9" at 3145.03,2738.74 h40 r90
  text "7" at 3225.03,2738.74 h40 r90
  text "5" at 3305.03,2738.74 h40 r90
  text "3" at 3380.03,2738.74 h40 r90
  text "AE" at 2330.03,2623.74 h40
  text "AC" at 2330.03,2543.74 h40
  text "AA" at 2330.03,2468.74 h40
  text "SBC RS232" at 96,2426 h60 r90
  text "W" at 2370.03,2388.74 h40
  text "U" at 2370.03,2313.74 h40
  text "R" at 2370.03,2238.74 h40
  text "N" at 2370.03,2153.74 h40
  text "L" at 2370.03,2078.74 h40
  text "J" at 2370.03,1993.74 h40
  text "G" at 2370.03,1918.74 h40
  text "E" at 2365.03,1838.74 h40
  text "C" at 2365.03,1758.74 h40
  text "A" at 2365.03,1683.74 h40
  text "Debug RS232" at 5252,1672 h60 r90
  text "LED Cntrl" at 383,1485 h60 r90
  text "Misc. I/O" at 882,1372 h60 r90
  text "Code" at 2655,947 h40
  text "Running" at 2537,878 h40
  text "Heartbeat" at 3455,839 h40
  text "Peltier Drive A" at 2049,736 h60
  text "Boot Loader Running" at 2976,721 h40
  text "Sensor Int. A" at 4990,456 h60 r90
  text "Camera" at 122,388 h60 r90
  text "LCD Display" at 2230,217 h60
  text "Silkscreen (Top)" at 3718.08,-465.14 h50
Bot Silk:
  drawing of 2394 lines, arcs and shapes, not listed
  text "Idaho Technology, Inc." at 1141,2405 h50 r90
  text "PCBA-SUB-0914" at 1328,2403 h50 r90
  text "FPGA PlateCycler" at 1235,2401 h50 r90
  text "20090825" at 1325,1613 h50 r90
  text "Silkscreen (Bottom)" at 3720.37,-462.85 h50
Top Paste:
  text "Solder Paste (Top)" at 3722.66,-455.97 h50
Bot Paste:
  text "Solder Paste (Bottom)" at 3722.66,-465.14 h50
Top Mask:
  text "Soldermask (Top)" at 3718.08,-460.56 h50
Bot Mask:
  text "Soldermask (Bottom)" at 3718.08,-460.56 h50
MECH15:
  text "TO DO: FIX PARALLEL FLASH ROUTING" at -3282,3548 h80
Fab Notes:
  text "PCBS-GEN-0914 REV 01" at 988.13,-437.38 h50
  text "FPGA PlateCycler Board" at 982.22,-543.48 h50
  text "30 April 2010" at 3861.96,-639.79 h50
  text "Idaho Technology" at 982.22,-643.48 h50
Drill Drawing:
  drawing of 185 lines, arcs and shapes, not listed
  text "Layer Stack-up" at 1115.12,7239.91 h57
  text "Description" at 1915.12,7239.91 h57
  text "Finished copper" at 2615.12,7239.91 h57
  text "Silkscreen (Top)" at 1810.12,7112.97 h53.86
  text "Solder Mask (Top)" at 1810.12,7012.97 h53.86
  text "Layer 1 (Top)" at 1810.12,6912.97 h53.86
  text "1/2 oz." at 2810.12,6912.97 h53.86
  text "Layer 2 - GND Plane" at 1810.12,6787.97 h53.86
  text "1/2 oz." at 2810.12,6787.97 h53.86
  text "Layer 3 - Signal" at 1810.12,6662.97 h53.86
  text "1/2 oz." at 2810.12,6662.97 h53.86
  text "Layer 4 - Signal" at 1810.12,6537.97 h53.86
  text "1/2 oz." at 2810.12,6537.97 h53.86
  text "Layer 5 - PWR Plane" at 1810.12,6412.97 h53.86
  text "1/2 oz." at 2810.12,6412.97 h53.86
  text "Layer 6 - Signal" at 1810.12,6287.97 h53.86
  text "1/2 oz." at 2810.12,6287.97 h53.86
  text "0.062\"" at 675.12,6274.91 h53.86
  text "+/-10%" at 715.12,6164.91 h53.86
  text "Layer 7 - Signal" at 1810.12,6162.97 h53.86
  text "1/2 oz." at 2810.12,6162.97 h53.86
  text "Layer 8 - PWR Plane" at 1810.12,6037.97 h53.86
  text "1/2 oz." at 2810.12,6037.97 h53.86
  text "Layer 9 - Signal" at 1810.12,5912.97 h53.86
  text "1/2 oz." at 2810.12,5912.97 h53.86
  text "Layer 10 - Signal" at 1810.12,5787.97 h53.86
  text "1/2 oz." at 2810.12,5787.97 h53.86
  text "Layer 11 - GND Plane" at 1810.12,5662.97 h53.86
  text "1/2 oz." at 2810.12,5662.97 h53.86
  text "Layer 12 (Bottom)" at 1810.12,5537.97 h53.86
  text "1/2 oz." at 2810.12,5537.97 h53.86
  text "Solder Mask (Bottom)" at 1810.12,5412.97 h53.86
  text "Solder Mask (Bottom)" at 1810.12,5412.97 h53.86
  text "Silkscreen (Bottom)" at 1810.12,5312.97 h53.86
  text ".Legend" at 6185.66,4474.4 h60

## Dimensions
318,200 to 318,4910 on Drill Drawing
318,200 to 5028,200 on Drill Drawing
0,0 to 5312.54,0.02 on Drill Drawing
0,0 to 0,5103.2 on Drill Drawing

## Text inside footprints (layer, text, board x,y; h text height)
C102: Bot Silk "+" at 2192.35,1932.2 h45.6 r90
C105: Bot Silk "+" at 3093.45,3158.78 h45.6
C172: Bot Silk "+" at 3590.11,2855.51 h45.6 r180
DISP1: Top Silk "16" at 3304.01,98.33 h30; Top Silk "1" at 1621.01,98.33 h30
J1: Top Silk "10" at 4977,3219 h30 r270; Top Silk "5" at 5084,3200 h30 r270; Top Silk "6" at 4982,2326 h30 r270; Top Silk "1" at 5112,2325 h30 r270
J2: Top Silk "14" at 153.1,1421.34 h30 r90; Top Silk "13" at 243.1,1421.34 h30 r90; Top Silk "2" at 160.1,2114.04 h30 r90; Top Silk "1" at 238.84,2117.94 h30 r90
J3: Top Silk "1" at 5107.25,440.4 h30 r270; Top Silk "2" at 5185.99,444.3 h30 r270; Top Silk "10" at 5189.93,987.3 h30 r270; Top Silk "9" at 5103.31,958.3 h30 r270
J4: Top Silk "V" at 623,303 h60 r180
J5: Top Silk "1" at 4938.25,3347.4 h30 r270; Top Silk "2" at 5016.99,3351.3 h30 r270; Top Silk "10" at 5020.93,3894.3 h30 r270; Top Silk "9" at 4934.31,3865.3 h30 r270
J6: Top Silk "12" at 156.1,3364.08 h30 r90; Top Silk "11" at 235.1,3374.08 h30 r90; Top Silk "2" at 160.1,3974.78 h30 r90; Top Silk "1" at 238.84,3978.68 h30 r90
J7: Top Silk "V" at 3113,293 h60 r180
J8: Top Silk "1" at 260.74,3074.97 h30 r90; Top Silk "6" at 390.74,3073.97 h30 r90; Top Silk "5" at 288.74,2199.97 h30 r90; Top Silk "10" at 395.74,2180.97 h30 r90
J9: Top Silk "12" at 607,1962 h30 r90; Top Silk "11" at 712,1967 h30 r90; Top Silk "2" at 612,1202 h30 r90; Top Silk "1" at 722,1207 h30 r90
J10: Top Silk "7" at 245.54,754.82 h30 r90; Top Silk "8" at 163.25,757.57 h30 r90; Top Silk "2" at 166.01,1193.7 h30 r90; Top Silk "1" at 244.75,1197.6 h30 r90
J12: Top Silk "2" at 3013,4402 h60; Top Silk "1" at 3023,4282 h60
J13: Top Silk "V" at 4271,5028 h60
J14: Top Silk "1" at 4388.79,3770.76 h35.47 r270; Top Silk "14" at 3794.3,3664.46 h35.47 r270; Top Silk "13" at 3794.3,3791.17 h35.47 r270; Top Silk "2" at 4388.79,3649.88 h35.47 r270